# Altium PCB anchor_sdl.PcbDoc
Units mil, origin at the board's own origin, x right, y up, seen from the top; angles counter-clockwise.
Board outline 3149.61 x 3149.61 mil, 4 copper layers (Top Layer, Signal Layer 1, Signal Layer 2, Bottom Layer), stack 58 mil thick; 53 components, 46 nets, 210 pads, 362 vias.
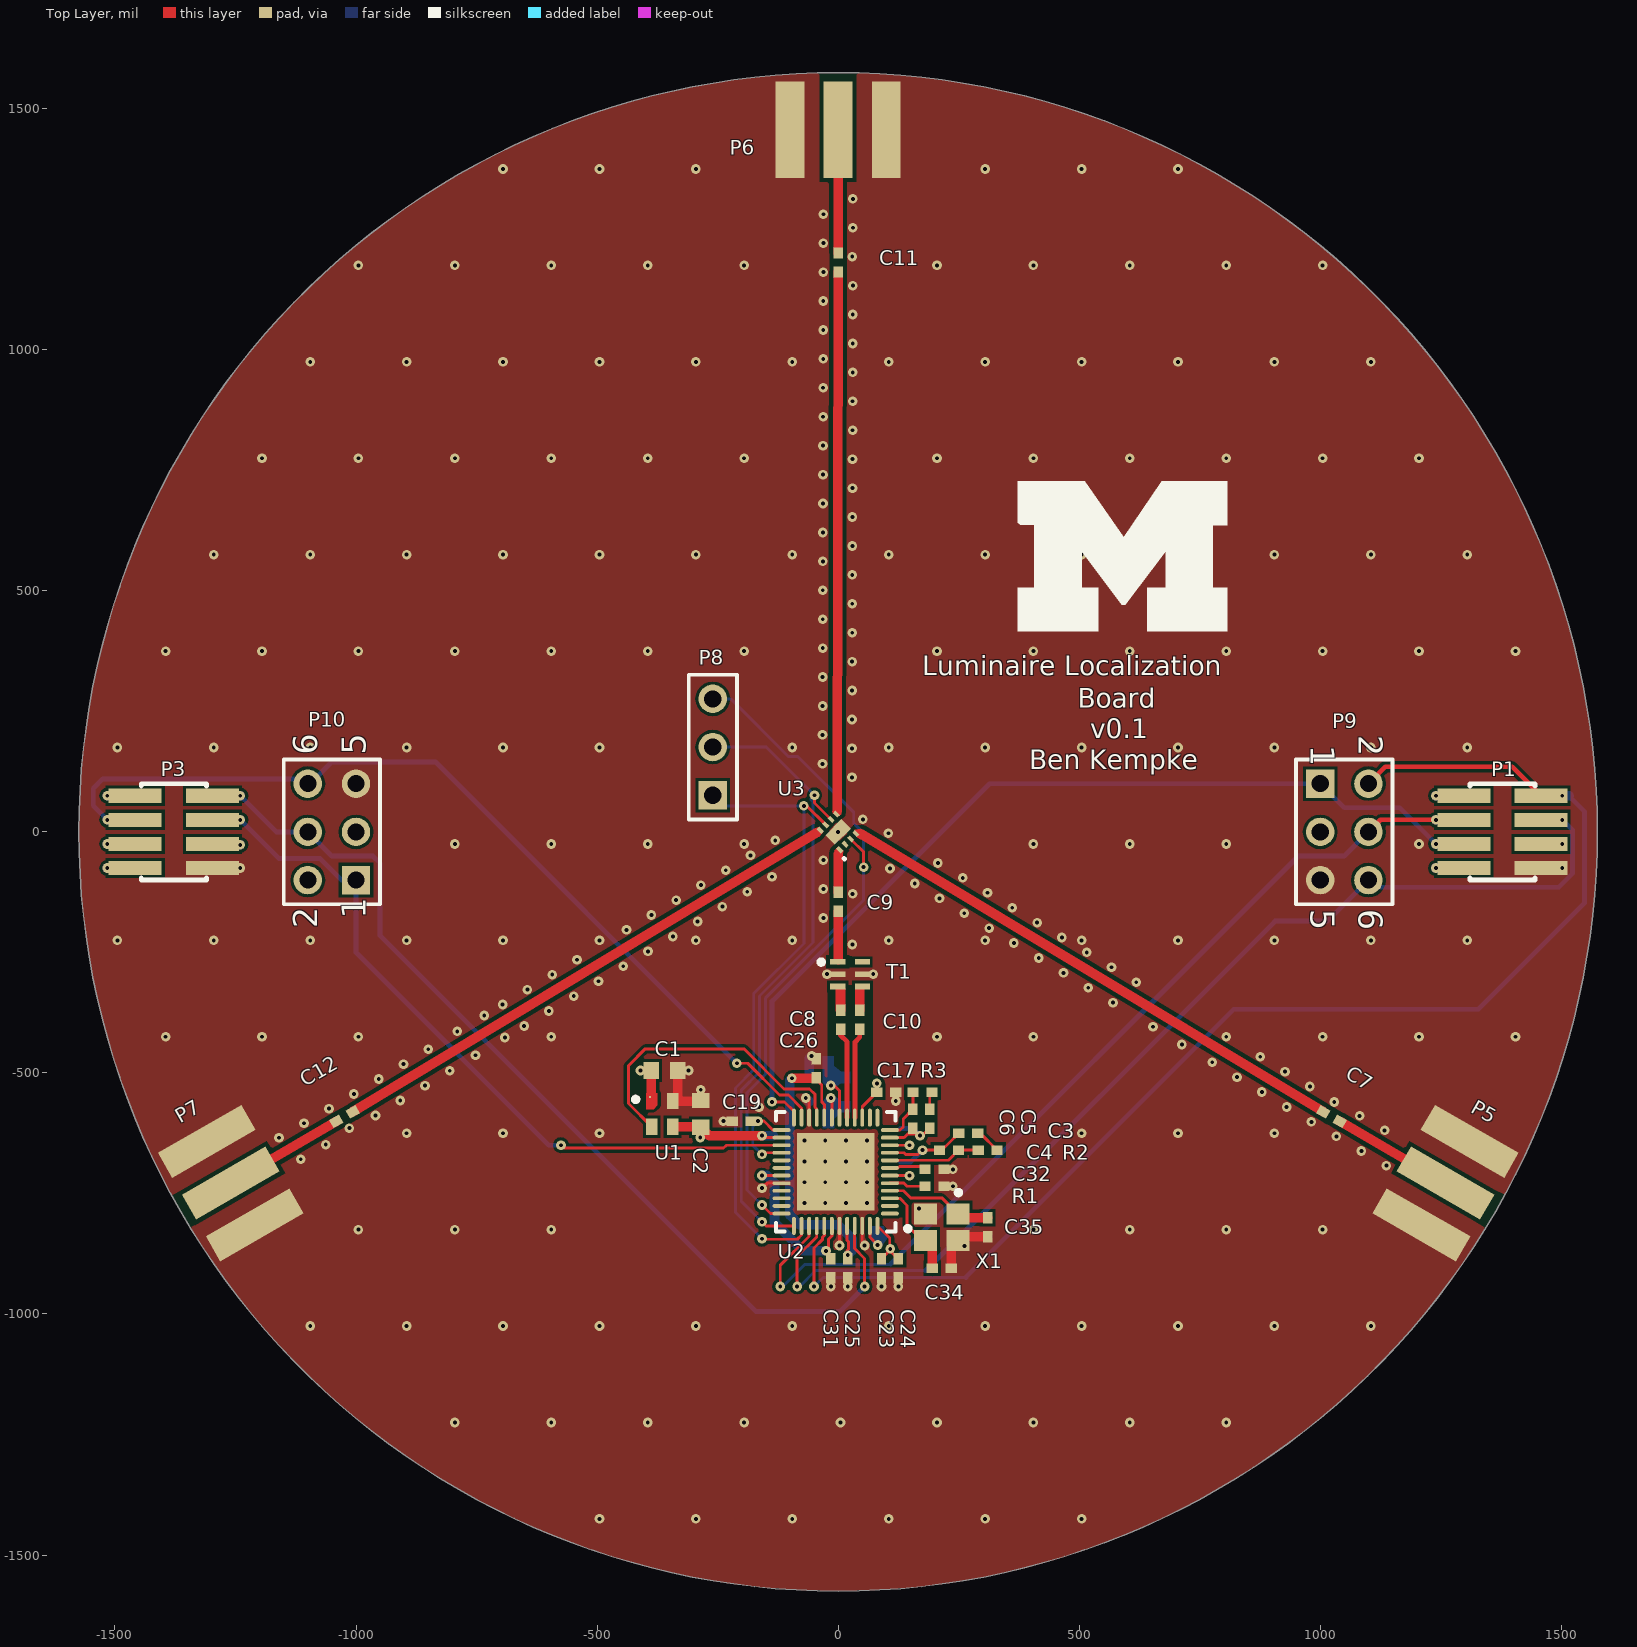
[diagram p0: Top Layer view]
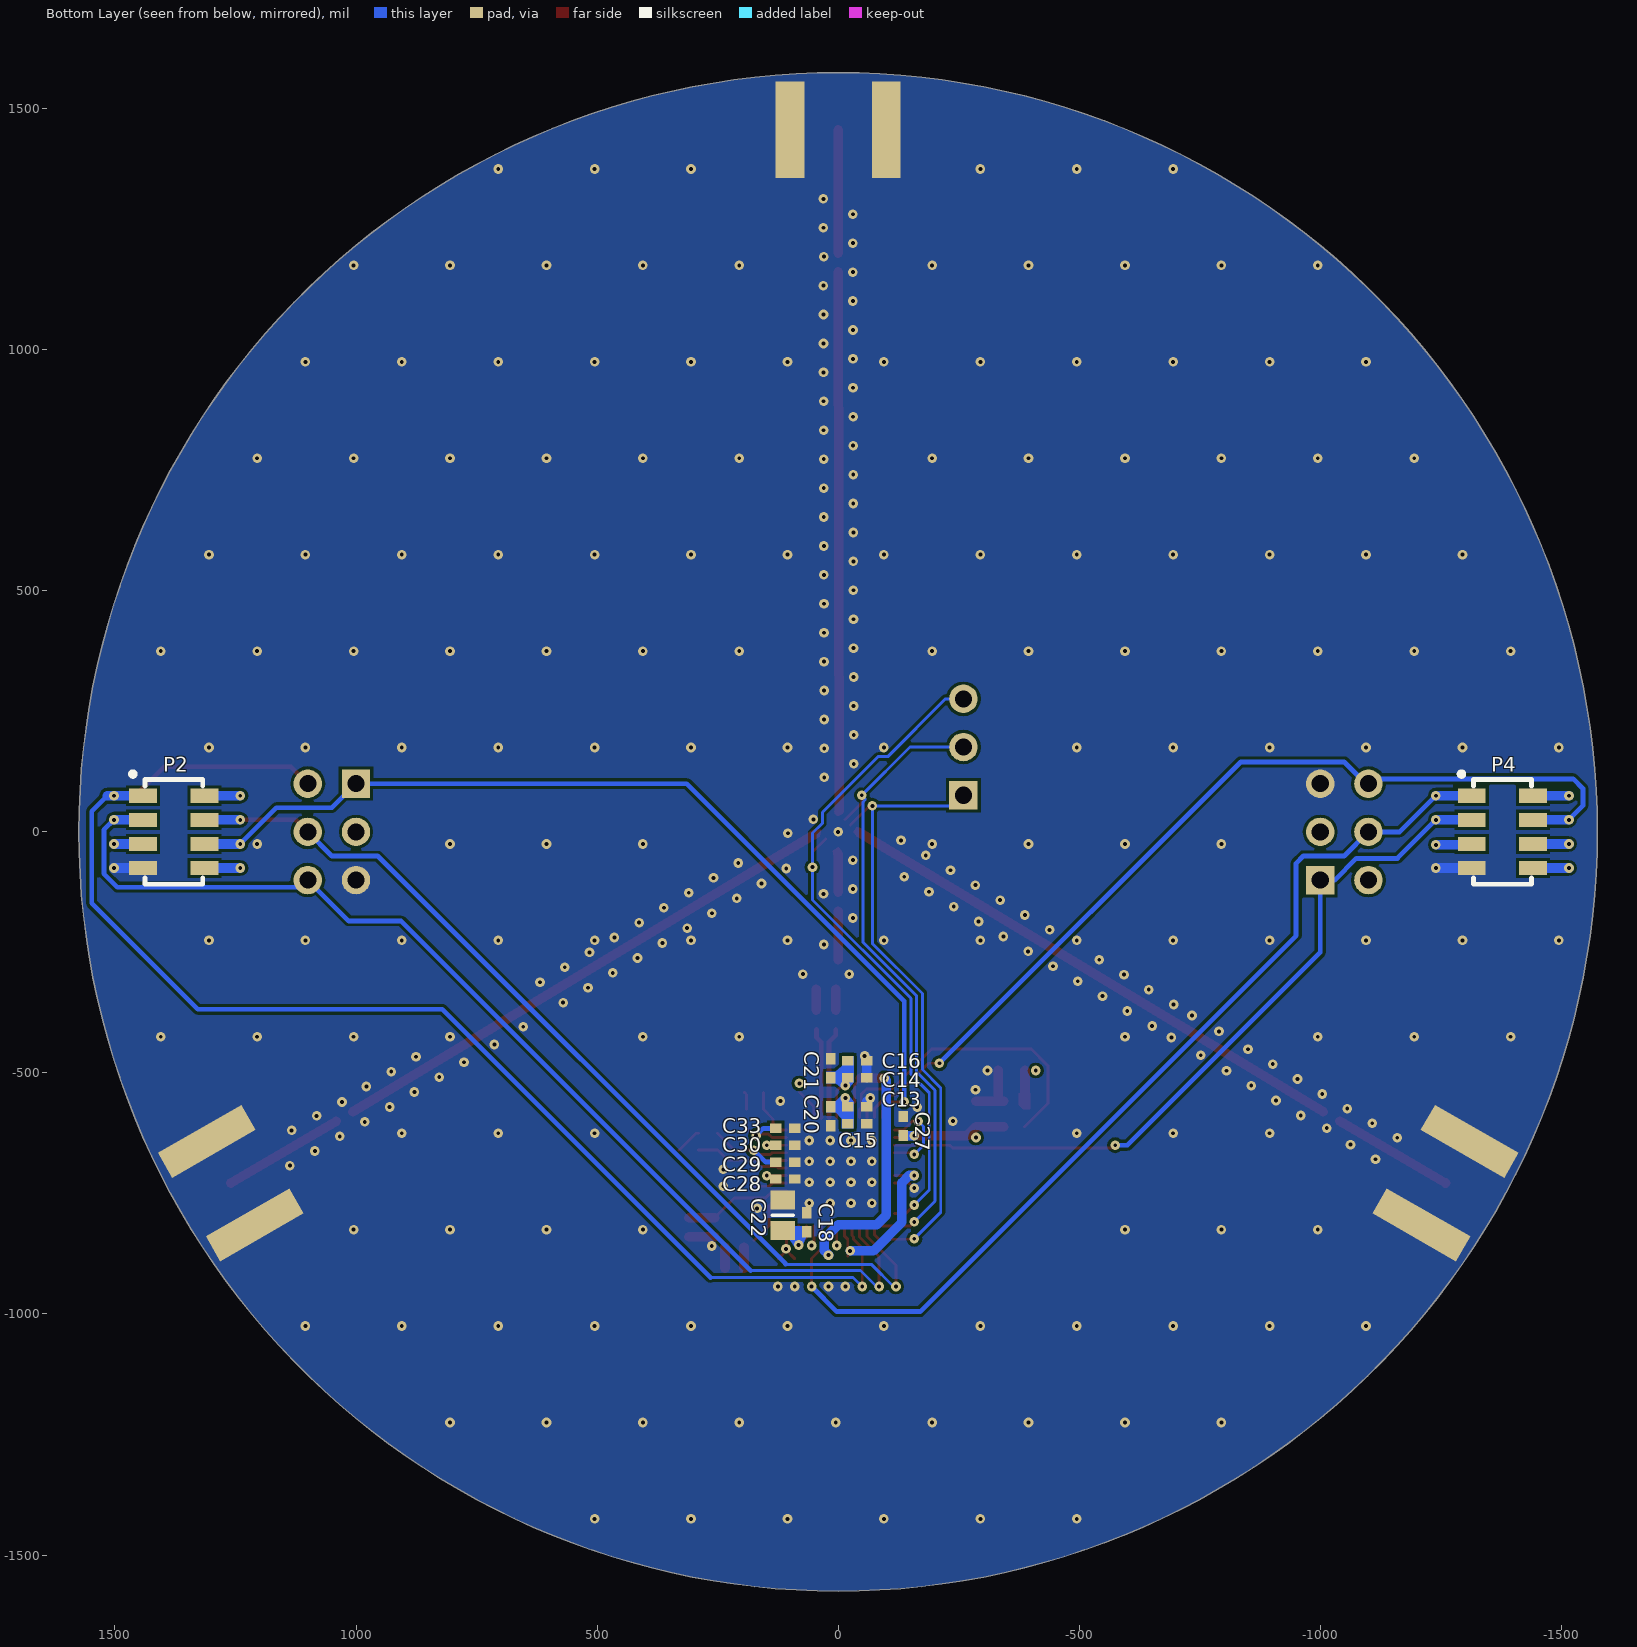
[diagram p1: Bottom Layer view, seen from below]
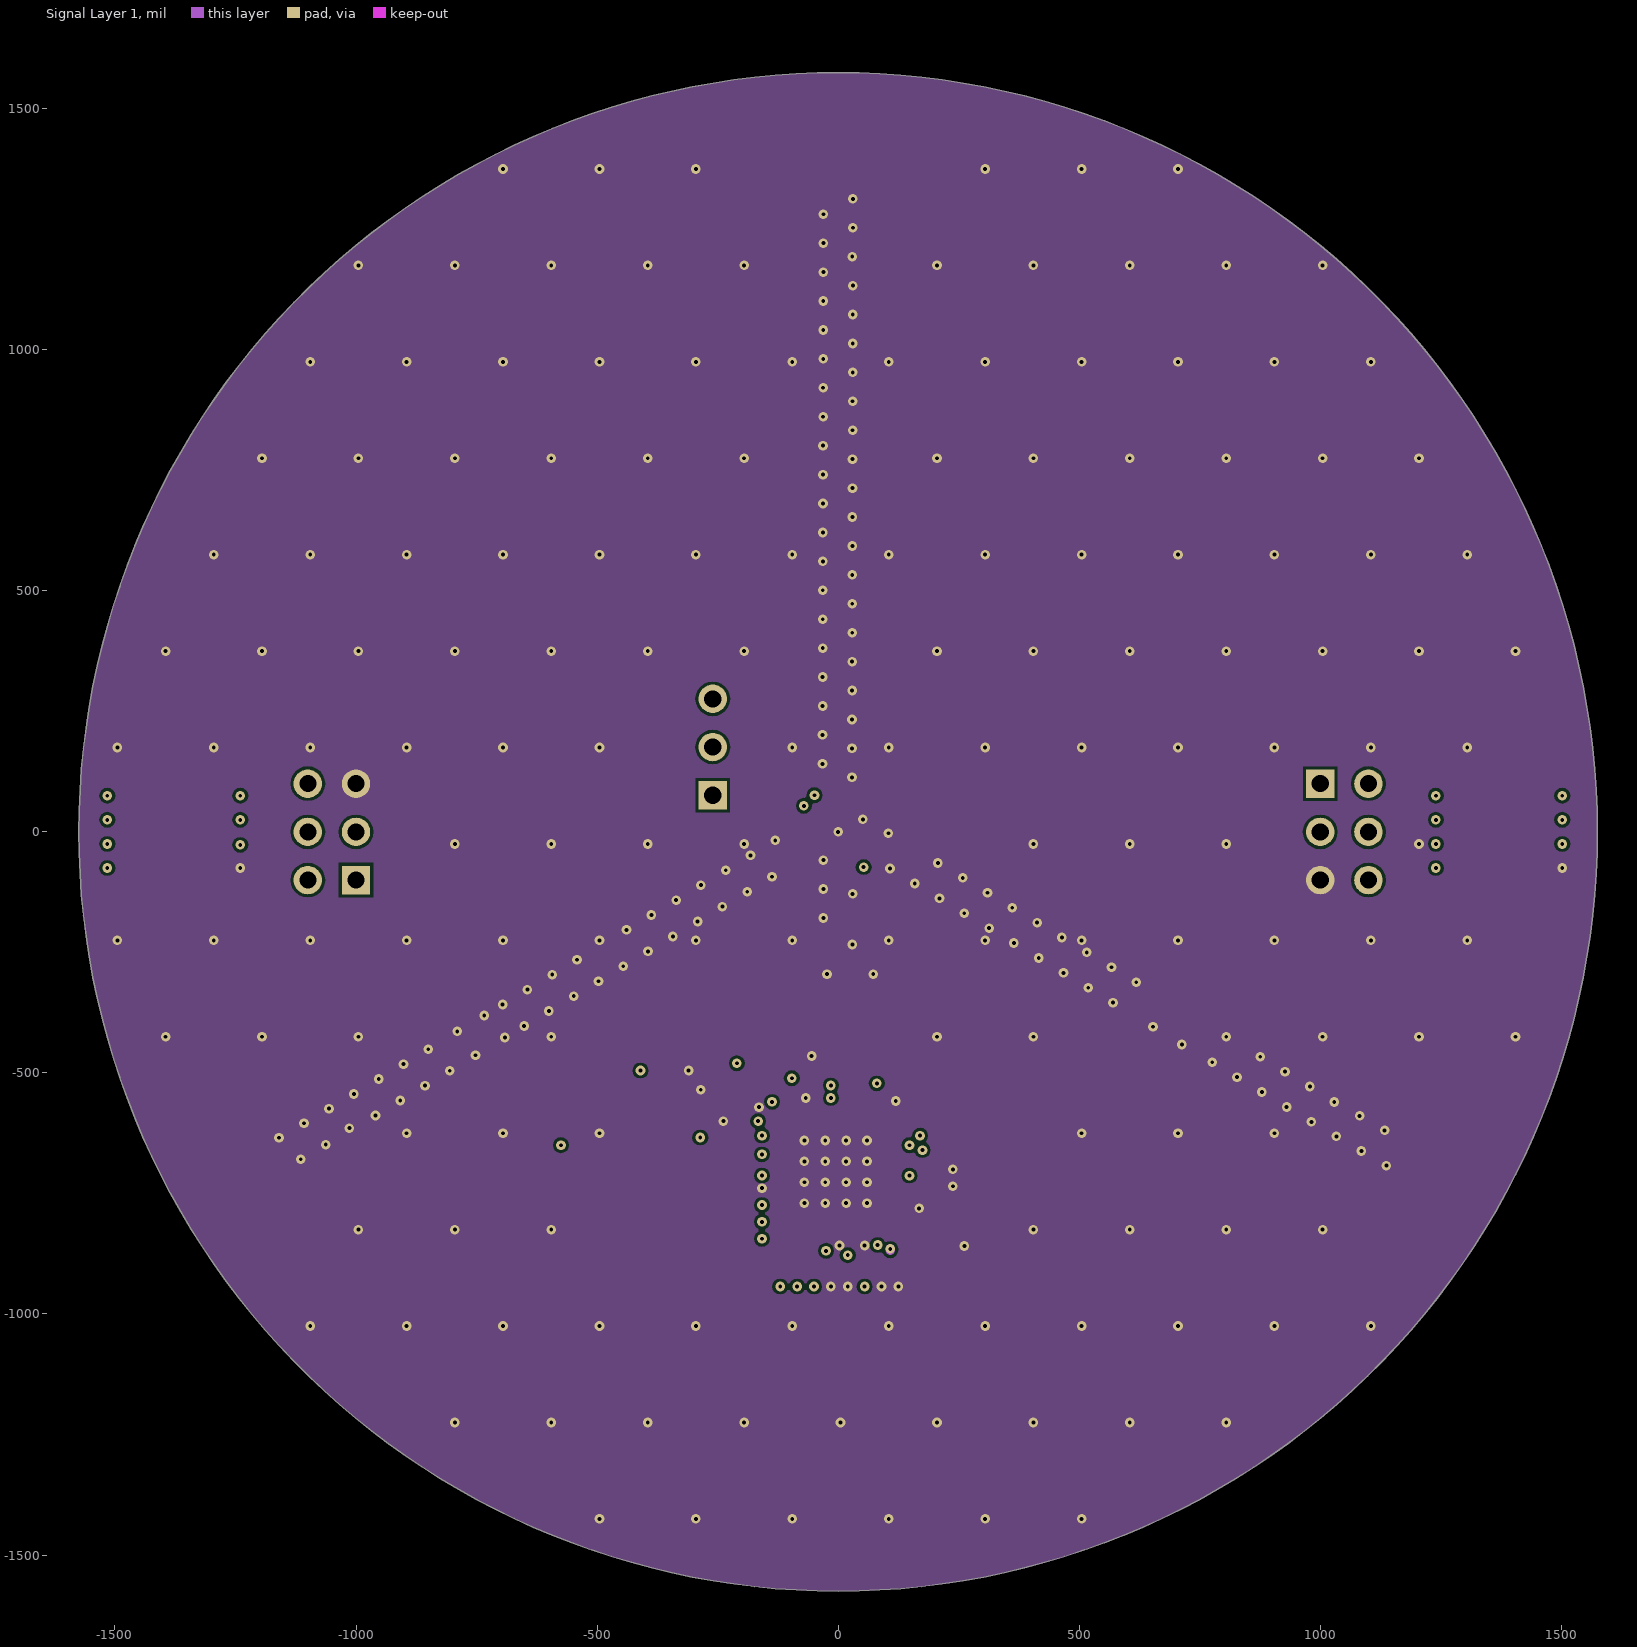
[diagram p2: Signal Layer 1]
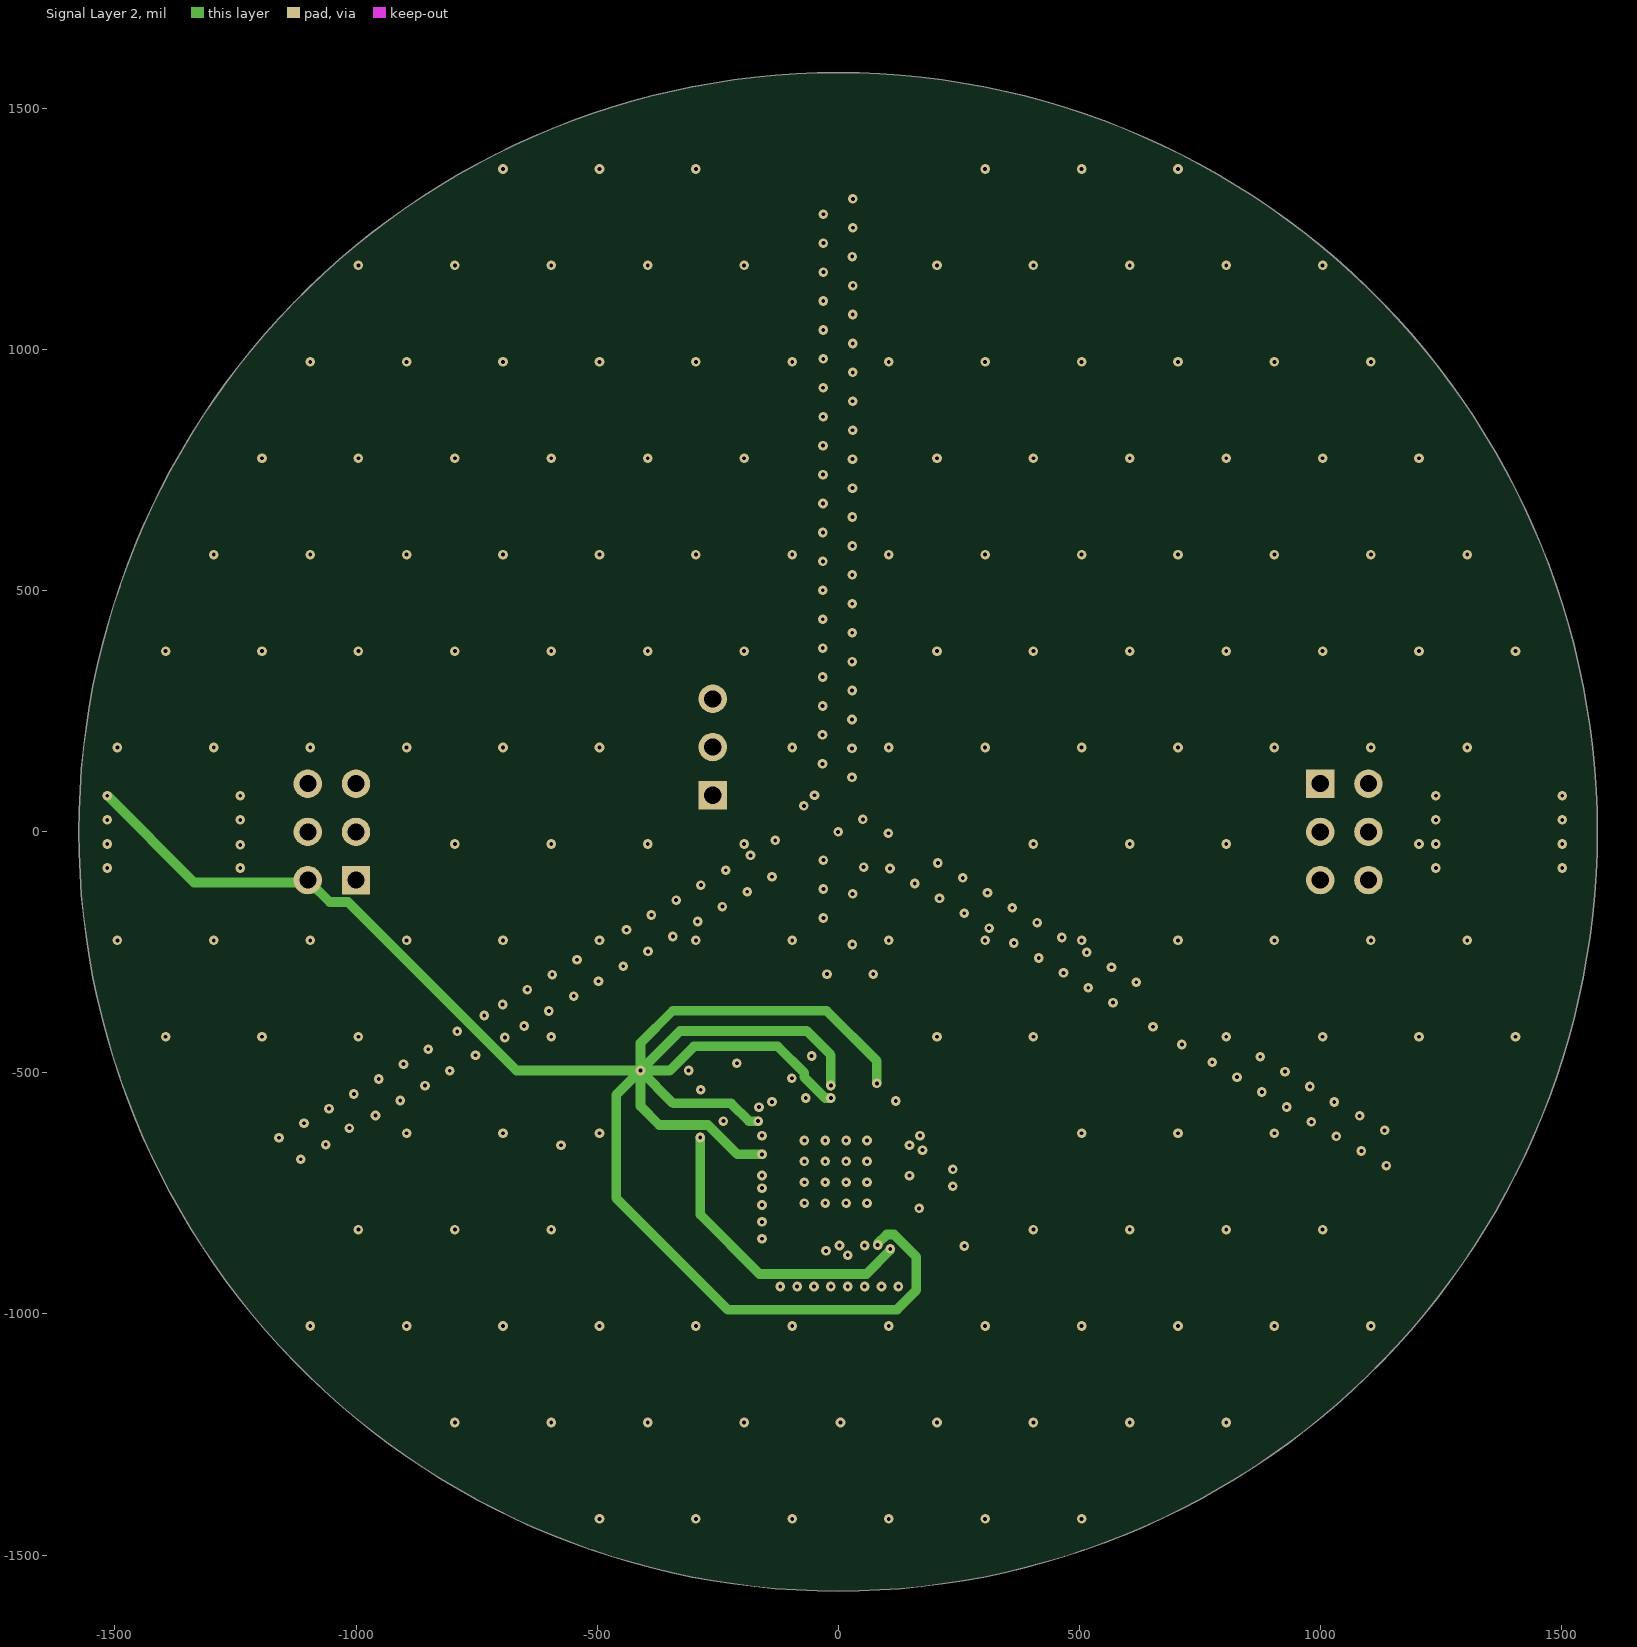
[diagram p3: Signal Layer 2]

## Layer stack, top to bottom
Top Solder: solder mask 0.4, Solder Resist, Dk 3.5
Top Layer: signal copper 1.7
Dielectric 1: core 11.9, FR-4, Dk 4.5
Signal Layer 1: signal copper 1.4
Dielectric 3: prepreg 28, Dk 4.5
Signal Layer 2: signal copper 1.4
Dielectric 2: core 11.9, Dk 4.5
Bottom Layer: signal copper 1.7
Bottom Solder: solder mask 0.4, Solder Resist, Dk 3.5

## Board outline
-1574.8,0 ccw(c0,0) 0,-1574.8 ccw(c0,0) 1574.8,0 ccw(c0,0) 0,1574.8 ccw(c0,0)

## Design rules (kind name [scope] priority, off if disabled: settings)
Clearance [All] p1: gap=6
DiffPairsRouting DiffPair_DiffPairsRouting [InDifferentialPair ('RF')] p1: maxlimit=6 minlimit=6 mostfreqgap=6 toplayer_minwidth=10 toplayer_maxwidth=10 toplayer_prefwidth=10 midlayer1_minwidth=10 midlayer1_maxwidth=10 midlayer1_prefwidth=10 midlayer2_minwidth=10 midlayer2_maxwidth=10 midlayer2_prefwidth=10 bottomlayer_minwidth=10 bottomlayer_maxwidth=10 bottomlayer_prefwidth=10 maxuncoupledlength=500
DiffPairsRouting [All] p2: maxlimit=10 minlimit=10 mostfreqgap=10 toplayer_minwidth=15 toplayer_maxwidth=15 toplayer_prefwidth=15 midlayer1_minwidth=15 midlayer1_maxwidth=15 midlayer1_prefwidth=15 midlayer2_minwidth=15 midlayer2_maxwidth=15 midlayer2_prefwidth=15 bottomlayer_minwidth=15 bottomlayer_maxwidth=15 bottomlayer_prefwidth=15 maxuncoupledlength=500
MatchedLengths DiffPair_MatchedLengths [InDifferentialPair ('RF')] p1: tolerance=1000 checknetsindiffpair=TRUE checkdiffpairvsdiffpair=TRUE checkothers=TRUE
MinimumSolderMaskSliver [All] p1: minsoldermaskwidth=0
PlaneConnect [All] p1: planeconnectstyle=Direct reliefexpansion=20 reliefentries=4 reliefconductorwidth=10 reliefairgap=10
PolygonConnect [All] p1: connectstyle=Direct reliefconductorwidth=10 reliefentries=4 polygonreliefangle="90 Angle" airgapwidth=10
RoutingVias [All] p1: holewidth=8 width=20 viastyle="Through Hole" minholewidth=8 minwidth=20 maxholewidth=238 maxwidth=250
SilkToSilkClearance [All] p1: silktosilkclearance=0
SilkToSolderMaskClearance [IsPad] p1: minsilkscreentomaskgap=0 clearancetoexposedcopper=TRUE
SolderMaskExpansion [All] p1: expansion=4
UnpouredPolygon [All] p1: allowunpoured=FALSE
Width [All] p1: maxlimit=100 minlimit=6 preferedwidth=6
24 further rules are at their usual default settings.

## Classes and differential pairs
component class decawave-rf: C3 C4 C5 C6 C7 C8 C9 C10 C11 C12 C13 C14 C15 C16 C17 C18 C19 C20 C21 C22 C23 C24 C25 C26 C27 C28 C29 C30 C31 C32 C33 C34 C35 P5 P6 P7 P8 R1 R2 R3 T1 U2 U3 X1
component class decawave-power: C1 C2 P1 P2 P3 P4 P9 P10 U1
net class RF: NetC7_1 NetC7_2 NetC9_1 NetC9_2 NetC11_1 NetC11_2 NetC12_1 NetC12_2
differential pair RF: +RF_P -RF_N

## Components (designator, comment, footprint, x,y, rotation, side; value= is the part's Value field where it differs from the comment)
C1 "Cap Chip" 0603 -360,-495 r0 top
C2 "Cap Chip" 0603 -285,-585 r90 top
C3 "Cap Chip" 0402 270,-625 r0 top
C4 "Cap Chip" 0402 230,-660 r0 top
C5 "Cap Chip" 0402 190,-595 r90 top
C6 "Cap Chip" 0402 155,-595 r90 top
C7 "Cap Chip" 0402 1023.62,-590.55 r330 top
C8 "Cap Chip" 0402 5,-390 r90 top
C9 "Cap Chip" 0402 0,-145 r90 top
C10 "Cap Chip" 0402 45,-390 r90 top
C11 "Cap Chip" 0402 0,1181.1 r90 top
C12 "Cap Chip" 0402 -1023.62,-590.55 r210 top
C13 "Cap Chip" 0402 -40,-570 r180 bottom
C14 "Cap Chip" 0402 -40,-510 r180 bottom
C15 "Cap Chip" 0402 -40,-605 r180 bottom
C16 "Cap Chip" 0402 -40,-475 r180 bottom
C17 "Cap Chip" 0402 100,-540 r0 top
C18 "Cap Chip" 0402 65,-810 r90 bottom
C19 "Cap Chip" 0402 -200,-600 r180 top
C20 "Cap Chip" 0402 15,-590 r270 bottom
C21 "Cap Chip" 0402 15,-490 r90 bottom
C22 "Cap Chip" 0805 115,-795 r90 bottom
C23 "Cap Chip" 0402 90,-905 r270 top
C24 "Cap Chip" 0402 125,-905 r270 top
C25 "Cap Chip" 0402 20,-905 r270 top
C26 "Cap Chip" 0402 -45,-490 r90 top
C27 "Cap Chip" 0402 -135,-610 r90 bottom
C28 "Cap Chip" 0402 110,-720 r180 bottom
C29 "Cap Chip" 0402 110,-685 r180 bottom
C30 "Cap Chip" 0402 110,-650 r180 bottom
C31 "Cap Chip" 0402 -15,-905 r270 top
C32 "Cap Chip" 0402 200,-700 r0 top
C33 "Cap Chip" 0402 110,-615 r180 bottom
C34 "Cap Chip" 0402 215,-905 r180 top
C35 "Cap Chip" 0402 310,-820 r90 top
P1 "FTSH Header" SAM_FTSH_2_4 1377.95,0 r0 top
P2 "CLP Header" SAM_CLP_2_4 1377.95,0 r180 bottom
P3 "FTSH Header" SAM_FTSH_2_4 -1377.95,0 r0 top
P4 "CLP Header" SAM_CLP_2_4 -1377.95,0 r180 bottom
P5 "SMA" SMA_EDGE 1259.84,-728.35 r330 top
P6 "SMA" SMA_EDGE 0,1456.69 r90 top
P7 "SMA" SMA_EDGE -1259.84,-728.35 r30 top
P8 "Header 3" HDR1X3 -260,76 r90 top
P9 "Header 3X2" HDR2X3 1000,100 r270 top
P10 "Header 3X2" HDR2X3 -1000,-100 r90 top
R1 "Res Chip" 0402 200,-735 r180 top
R2 "Res Chip" 0402 310,-660 r180 top
R3 "Res Chip" 0402 175,-540 r180 top
T1 "HHM1595A1" "HHM 0805" 25,-295 r270 top
U1 "LXDC2HL" LXDC2HL -365,-585 r90 top
U2 "DW1000" 48QFN-EP -5,-705 r180 top
U3 "SKY13317" MLPQ-UT-8 0,0 r135 top
X1 "FA-20H" FA-20H 215,-820 r180 top

## Footprints (in the part's own frame and the unit in brackets; to place one, negate y for a bottom-side part, rotate by r counter-clockwise, add the part's x,y. Pads: shape width x height; smd on the part's side, far side on the other; paste and mask are expansions set on the pad)
48QFN-EP [mm] "QFN, 48-Leads, Body 6.00x6.00mm, Pitch 0.40mm, Thermal Pad 4.10x4.10mm, IPC Medium Density"
  oval 0.95x0.2 smd: 1(-2.85,2.2) 2(-2.85,1.8) 3(-2.85,1.4) 4(-2.85,1) 5(-2.85,0.6) 6(-2.85,0.2) 7(-2.85,-0.2) 8(-2.85,-0.6) 9(-2.85,-1) 10(-2.85,-1.4) 11(-2.85,-1.8) 12(-2.85,-2.2) 25(2.85,-2.2) 26(2.85,-1.8) 27(2.85,-1.4) 28(2.85,-1) 29(2.85,-0.6) 30(2.85,-0.2) 31(2.85,0.2) 32(2.85,0.6) 33(2.85,1) 34(2.85,1.4) 35(2.85,1.8) 36(2.85,2.2)
  oval 0.2x0.95 smd: 13(-2.2,-2.85) 14(-1.8,-2.85) 15(-1.4,-2.85) 16(-1,-2.85) 17(-0.6,-2.85) 18(-0.2,-2.85) 19(0.2,-2.85) 20(0.6,-2.85) 21(1,-2.85) 22(1.4,-2.85) 23(1.8,-2.85) 24(2.2,-2.85) 37(2.2,2.85) 38(1.8,2.85) 39(1.4,2.85) 40(1,2.85) 41(0.6,2.85) 42(0.2,2.85) 43(-0.2,2.85) 44(-0.6,2.85) 45(-1,2.85) 46(-1.4,2.85) 47(-1.8,2.85) 48(-2.2,2.85)
  rect 4.1x4.1 smd: 49(0,0)
  silkscreen extent -3.93,-3.15 3.15,3.15, body extent -3,-3 3,3, height 0.9
0402 [mm] "Chip Capacitor, Body 1.0x0.5mm, IPC High Density"
  rect 0.6x0.5 smd: 1(-0.5,0) 2(0.5,0)
  body extent -0.55,-0.3 0.55,0.3, height 0.6
0603 [mm] "Chip Capacitor, Body 1.6x0.8mm, IPC High Density"
  rect 0.8x0.9 smd: 1(-0.7,0) 2(0.7,0)
  body extent -0.87,-0.48 0.87,0.48, height 0.9
0805 [mm] "Chip Resistor, Body 2.0x1.2mm, IPC High Density"
  rect 1x1.3 smd: 1(-0.8,0) 2(0.8,0)
  silkscreen extent 0,-0.55 0,0.55, body extent -1.07,-0.7 1.07,0.7, height 0.7
FA-20H [mm]
  rect 1.2x1.1 smd: 1(-0.85,-0.7) 2(0.85,-0.7) 3(0.85,0.7) 4(-0.85,0.7)
  silkscreen extent -1,-1.95 -0.75,-1.7, body extent -1.25,-1 1.25,1, height 0.55
HDR1X3 [mm] "Connector; Header; 3 Position"
  rect 1.5x1.5 hole 0.9: 1(0,0)
  round 1.5 hole 0.9: 2(2.54,0) 3(5.08,0)
  silkscreen extent -1.27,-1.27 6.35,1.27
HDR2X3 [mm] "Connector; Header; 3x2 Position"
  rect 1.5x1.5 hole 0.9: 1(0,0)
  round 1.5 hole 0.9: 2(0,2.54) 3(2.54,0) 4(2.54,2.54) 5(5.08,0) 6(5.08,2.54)
  silkscreen extent -1.27,-1.27 6.35,3.81
"HHM 0805" [mm]
  rect 0.3x0.8 smd: 1(-0.65,-0.65) 2(0,-0.65) 3(0.65,-0.65) 4(0.65,0.65) 5(0,0.65) 6(-0.65,0.65)
  silkscreen extent -0.76,-1.65 -0.51,-1.4
LXDC2HL [mm]
  rect 0.1x0.1 smd: 1(0.889,0.635)
  rect 0.85x0.6 smd: 2(-0.675,0.55) 3(-0.675,-0.55) 4(0.675,-0.55)
  Top Layer region: 0.25,0.85 0.25,0.45 0.45,0.25 1.1,0.25 1.1,0.85
  silkscreen extent 0.64,1.27 0.89,1.52
MLPQ-UT-8 [mm]
  rect 0.35x0.2 smd: 1(-0.725,0.6) 2(-0.725,0.2) 3(-0.725,-0.2) 4(-0.725,-0.6) 5(0.725,-0.6) 6(0.725,-0.2) 7(0.725,0.2) 8(0.725,0.6)
  rect 0.7x1.2 smd: 9(0,0)
  silkscreen extent -1.25,0.77 -1.21,0.77, body extent -0.75,-0.75 0.75,0.75, height 0.4
SAM_CLP_2_4 [mm]
  rect 1.47x0.74 smd: 1(-1.615,1.905) 2(1.615,1.905) 3(-1.615,0.635) 4(1.615,0.635) 5(-1.615,-0.635) 6(1.615,-0.635) 7(-1.615,-1.905) 8(1.615,-1.905)
  silkscreen extent -2.28,-2.76 1.53,3.17, body extent -1.53,-2.76 1.53,2.76, height 2.29
SAM_FTSH_2_4 [mm]
  rect 2.79x0.74 smd: 1(-2.035,1.905) 2(2.035,1.905) 3(-2.035,0.635) 4(2.035,0.635) 5(-2.035,-0.635) 6(2.035,-0.635) 7(-2.035,-1.905) 8(2.035,-1.905)
  silkscreen extent -1.72,-2.54 1.72,2.54, body extent -1.72,-2.54 1.72,2.54, height 2.92
SMA_EDGE [mm]
  rect 5.08x1.52 smd: 1(0,0) 2(0,-2.54) 2(0,2.54)
  rect 5.08x1.52 smd far side: 2(0,-2.54) 2(0,2.54)

## Part data
C1 C2 C3 C4 C5 C6 C7 C8 C9 C10 C11 C12 C13 C14 C15 C16 C17 C18 C19 C20 C21 C22 C23 C24 C25 C26 C27 C28 C29 C30 C31 C32 C33 C34 C35: "Capacitor (Semiconductor SIM Model)"
P1 P3: "Samtec FTSH 2x4 0.05\" Male Header"
P2 P4: "Samtec CLP 2x4 0.05\" Female Header"
P8: "Header, 3-Pin"
P9 P10: "Header, 3-Pin, Dual row"
R1 R2 R3: "Surface-mount resistor"
T1: "UWB Balun"
U3: "SP3T RF Switch"
X1: "2.5 mm x 2.0 mm SMD Crystal"

## Via types
v1: diameter 20, hole 8, Top Layer to Bottom Layer, tented both sides, 346 vias
v2: diameter 20, hole 8, Top Layer to Bottom Layer, 16 vias

## Nets (pads, with @x,y where several pads share a name; then routed paths per layer and width w, separated by ;. In a path a pad name is that pad's centre, name@x,y a point inside that pad or via, vN(x,y) a via of type N, cw(c..) or ccw(c..) an arc to the next point about the centre after c; other vN are vias at no path point)
ANT_SEL0: P8.3 U2.36 U3.3 | length 1443.9
  Top Layer w6: v1(-158,-774) -140.39,-791.61 U2.36 ; U3.3 53,-41.86 v1(53,-73)
  Bottom Layer w6: P8.3 -222.87,276 -102.87,156 -83,156 32.41,40.59 32.41,18 53,-2.58 v1(53,-73) 53,-141.2 -151,-345.2 -151,-503 -189,-541 -189,-743 v1(-158,-774)
ANT_SEL1: P8.2 U2.37 U3.6 | length 1355.8
  Top Layer w6: v1(-158,-809) -149.8,-817.2 U2.37 ; v1(-49,76) -49,60.14 U3.6
  Bottom Layer w6: P8.2 -149,176 v1(-49,76) -56,69 -56,65.87 -52,61.87 -52,-229.23 -163,-340.23 -163,-498.03 -201,-536.03 -201,-766 v1(-158,-809)
ANT_SEL2: P8.1 U2.38 U3.7 | length 1313.1
  Top Layer w6: v1(-158,-844) -157.09,-844.91 -84.91,-844.91 -75.87,-835.87 U2.38 ; v1(-71,54) -65.14,54 U3.7
  Bottom Layer w6: P8.1@-238,54 v1(-71,54) -71,-231.26 -175,-335.26 -175,-493.06 -213,-531.06 -213,-789 v1(-158,-844)
DW_IRQN: P3.2 P4.1 P10.4 U2.45 | length 2042
  Top Layer w6: U2.45 34.37,-864.24 55,-884.87 v1(55,-943)
  Bottom Layer w10: v1(-1240,75) -1165,0 P10.4 -1050,-50 -965,-50 -950,-65 -950,-215 -170,-995 3,-995 v1(55,-943)
  Bottom Layer w20: P4.1@-1300,75 v1(-1240,75)
DW_RSTN: P3.4 P4.3 P10.1 U2.27 | length 1569.6
  Top Layer w6: v1(-574.88,-649.88) -568.76,-656 -237.74,-656 -231.62,-649.88 U2.27
  Bottom Layer w10: v1(-1240,25) -1160,-55 -1075,-55 -1030,-100 P10.1 -1000,-250 -600.12,-649.88 v1(-574.88,-649.88)
  Bottom Layer w20: P4.3 v1(-1240,25)
DW_WAKEUP: P3.3 P4.4 P10.6 U2.23 | length 1954.6
  Top Layer w6: v1(-210,-480) -187.44,-480 -121.44,-546 -103,-546 -75.87,-573.13 U2.23
  Bottom Layer w10: v1(-1515.91,25) -1545,54.09 -1545,90 -1525,110 P10.6@-1110,110 ; P10.6 -1095,100 -1050,145 -835,145 v1(-210,-480)
  Bottom Layer w20: v1(-1515.91,25) P4.4
GND: C1.2 C2.2 C13.2 C14.2 C15.2 C16.2 C17.2 C18.2 C19.2 C20.2 C21.2 C22.2 C23.2 C24.2 C25.2 C26.2 C27.2 C28.2 C29.2 C30.2 C31.2 C32.2 C33.2 C34.1 C35.1 P1.8 P2.7 P3.8 P4.7 P5.2 P6.2 P7.2 P9.5 P10.5 R1.1 T1.2 T1.5 U1.4 U2.22 U2.32 U2.43 U2.46 U2.49 U3.9 X1.2 X1.4 | length 570.2
  Top Layer w6: v1(-158,-739) -157.37,-739 -147,-728.62 U2.32 ; U2.22 v1@-60.12,-552.12 ; v1@2.87,-857.88 U2.43 ; v1@50.12,-853.12 U2.46
  Top Layer w20: U1.4 C2.2@-285.98,-558.43 ; U1.4@-332.44,-555.98 C1.2 ; C34.1 X1.4@234.69,-861.34 ; X1.4@256.34,-839.68 C35.1
  Bottom Layer w20: P4.7 v1(-1240,-75) ; v1(-67,-552) -59.69,-559.31 ; C14.2 C16.2 -59.69,-469.69 v1(-55,-465) ; P2.7 v1(1502,-75)
  other v1: -495,-1425 -295,-1425 -95,-1425 105,-1425 305,-1425 505,-1425 -795,-1225 -595,-1225 -395,-1225 -195,-1225 5,-1225 205,-1225 405,-1225 605,-1225 805,-1225 -1095,-1025 -895,-1025 -695,-1025 -495,-1025 -295,-1025 -95,-1025 105,-1025 305,-1025 505,-1025 705,-1025 905,-1025 1105,-1025 -15,-943 20,-943 90,-943 125,-943 262,-859 2.76,-858 55,-858 -995,-825 -795,-825 -595,-825 405,-825 605,-825 805,-825 1005,-825 168,-781 238,-735 238,-700 1137.21,-692.17 -1114.69,-679.02 1085.39,-661.92 -1062.87,-648.77 -1159.72,-634.48 1033.58,-631.67 -895,-625 -695,-625 -495,-625 505,-625 705,-625 905,-625 1133.59,-619.22 -1013.69,-614.4 -1107.91,-604.23 981.74,-601.47 -238,-600 1081.78,-588.97 -959.71,-588.2 -1056.09,-573.98 -164,-571 930.31,-570.56 1029.06,-560.33 119.69,-558.31 -908.3,-557.27 -1004.32,-543.65 878.88,-539.65 -285,-535 978.44,-528.11 -856.9,-526.33 -952.91,-512.71 827.46,-508.74 927.01,-497.2 -805.49,-495.39 -310,-495 -901.5,-481.77 776.03,-477.84 875.59,-466.3 -752.2,-463.32 -850.09,-450.83 713.03,-441.09 -691.2,-426.39 -1395,-425 -1195,-425 -995,-425 -595,-425 205,-425 405,-425 805,-425 1005,-425 1205,-425 1405,-425 -790.09,-413.83 653.03,-404.09 -651.26,-402.57 -734.09,-380.83 -599.86,-371.63 -695.87,-358.02 570.32,-354.21 -548.45,-340.69 -644.46,-327.08 518.9,-323.3 618.45,-311.76 -497.04,-309.75 -593.06,-296.14 -23,-295 73,-295 467.47,-292.39 567.03,-280.85 -445.63,-278.81 -541.65,-265.2 416.04,-261.48 515.6,-249.94 -394.22,-247.88 29.59,-233.51 364.61,-230.57 -1495,-225 -1295,-225 -1095,-225 -895,-225 -695,-225 -495,-225 -295,-225 -95,-225 105,-225 305,-225 505,-225 705,-225 905,-225 1105,-225 1305,-225 464.17,-219.04 -342.82,-216.94 -438.83,-203.32 313.19,-199.67 412.74,-188.13 -291.41,-186 -30.59,-178.49 -387.42,-172.38 261.76,-168.76 361.32,-157.22 -240,-155.06 -336.02,-141.44 210.33,-137.85 30.2,-128.58 309.89,-126.31 -188.59,-124.12 -30.59,-118.49 -284.61,-110.5 158.91,-106.94 258.46,-95.4 -137.18,-93.18 -233.2,-79.57 107.48,-76.04 207.04,-64.5 -30.59,-58.49 -181.79,-48.63 -795,-25 -595,-25 -395,-25 -195,-25 405,-25 605,-25 805,-25 1205,-25 -130.38,-17.69 104.18,-2.68 0,0 51.41,25.87 28.71,113.13 -32.41,141.13 28.82,173.13 -1495,175 -1295,175 -1095,175 -895,175 -695,175 -495,175 -95,175 105,175 305,175 505,175 705,175 905,175 1105,175 1305,175 -32.31,201.13 28.93,233.13 -32.2,261.13 29.03,293.13 -32.09,321.13 29.14,353.13 -1395,375 -1195,375 -995,375 -795,375 -595,375 -395,375 -195,375 205,375 405,375 605,375 805,375 1005,375 1205,375 1405,375 -31.98,381.13 29.25,413.13 -31.88,441.13 29.36,473.13 -31.77,501.13 29.46,533.13 -31.66,561.13 -1295,575 -1095,575 -895,575 -695,575 -495,575 -295,575 -95,575 105,575 305,575 505,575 705,575 905,575 1105,575 1305,575 29.57,593.13 -31.55,621.13 29.68,653.13 -31.45,681.13 29.79,713.13 -31.34,741.13 29.89,773.13 -1195,775 -995,775 -795,775 -595,775 -395,775 -195,775 205,775 405,775 605,775 805,775 1005,775 1205,775 -31.23,801.13 30,833.13 -31.13,861.13 30.11,893.13 -31.02,921.13 30.21,953.13 -1095,975 -895,975 -695,975 -495,975 -295,975 -95,975 105,975 305,975 505,975 705,975 905,975 1105,975 -30.91,981.13 30.32,1013.13 -30.8,1041.13 30.43,1073.13 -30.7,1101.13 30.54,1133.13 -30.59,1161.13 -995,1175 -795,1175 -595,1175 -395,1175 -195,1175 205,1175 405,1175 605,1175 805,1175 1005,1175 29.46,1193.12 -30.59,1221.13 30.59,1253.11 -30.59,1281.13 30.59,1313.11 -695,1375 -495,1375 -295,1375 305,1375 505,1375 705,1375
  other v2: -69.96,-769.96 -26.65,-769.96 16.65,-769.96 59.96,-769.96 -69.96,-726.65 -26.65,-726.65 16.65,-726.65 59.96,-726.65 -69.96,-683.35 -26.65,-683.35 16.65,-683.35 59.96,-683.35 -69.96,-640.04 -26.65,-640.04 16.65,-640.04 59.96,-640.04
NET_CTRL: P3.6 P4.5 | length 75.2
  Bottom Layer w20: P4.5 -1312.37,-27 v1(-1240,-27)
NET_INT: P3.5 P4.6 | length 74.4
  Bottom Layer w20: v1(-1515.91,-25) P4.6
NetC3_2: C3.2 R2.1 | length 54.5
  Top Layer w6: C3.2 294.68,-625 R2.1
NetC4_2: C4.2 R2.2 U2.8 | length 192
  Top Layer w6: U2.8 125.62,-681.38 126,-681 228.69,-681 C4.2 R2.2
NetC5_2: C5.2 R3.1 | length 37.3
  Top Layer w6: C5.2 190,-544.69 R3.1
NetC6_2: C6.2 R3.2 U2.12 | length 110.4
  Top Layer w6: U2.12 128.61,-618.39 135,-612 135,-595.31 C6.2 R3.2@155,-540.32
NetC7_1: C7.1 U3.4 | length 1119.5
  Top Layer w20: 47,-4 C7.1
NetC7_2: C7.2 P5.1 | length 253.8
  Top Layer w20: C7.2 P5.1
NetC8_2: C8.2 T1.3 | length 44.1
  Top Layer w20: C8.2 T1.3@5,-326.18
NetC9_1: C9.1 T1.1 | length 100.3
  Top Layer w20: T1.1@0,-265 C9.1
NetC9_2: C9.2 U3.1 | length 80.3
  Top Layer w20: C9.2 0,-45
NetC10_2: C10.2 T1.4 | length 44.1
  Top Layer w20: C10.2 T1.4@45,-326.18
NetC11_1: C11.1 U3.5 | length 1117.4
  Top Layer w20: -2,44 C11.1
NetC11_2: C11.2 P6.1 | length 255.9
  Top Layer w20: C11.2 P6.1
NetC12_1: C12.1 U3.8 | length 1122.3
  Top Layer w20: C12.1 -45,-2
NetC12_2: C12.2 P7.1 | length 253.8
  Top Layer w20: P7.1 C12.2
NetC34_2: C34.2 U2.3 X1.3 | length 171.3
  Top Layer w6: U2.3 128.12,-760.12 143,-775 143,-816 X1.3@174.56,-847.56
  Top Layer w20: C34.2 X1.3@195.31,-861.34
NetC35_2: C35.2 U2.4 X1.1 | length 214.8
  Top Layer w6: U2.4 135.37,-744.37 150,-759 215.02,-759 X1.1
  Top Layer w20: X1.1@256.34,-800.31 C35.2
NetP1_7: P1.7 P2.8 | length 74.4
  Bottom Layer w20: v1(1240,-75) P2.8
NetP3_7: P3.7 P4.8 | length 74.4
  Bottom Layer w20: v1(-1515.91,-75) P4.8
NetR1_2: R1.2 U2.5 | length 75.8
  Top Layer w6: U2.5 136.76,-728.62 143.14,-735 R1.2
RF_N: C8.1 U2.17 | length 188.8
  Top Layer w10: C8.1 5,-422 18.62,-435.62 U2.17
RF_P: C10.1 U2.16 | length 186.6
  Top Layer w10: U2.16@35,-592.17 35,-436 45,-426 C10.1
SPI_CLK: P1.2 P2.1 P9.2 U2.41 | length 2770
  Top Layer w6: v1(-50,-943) -50,-862.94 -32,-844.94 -32,-840 -28.62,-836.62 U2.41
  Top Layer w10: P9.2 1135,135 1398.07,135 P1.2
  Bottom Layer w6: v1(-50,-943) -31,-924 265,-924
  Bottom Layer w10: 265,-924 821,-368 1328,-368 1548,-148 1548,42.91 1515.91,75
  Bottom Layer w20: P2.1 v1(1502,75) 1515.91,75
SPI_CSN_DW: P1.5 P2.6 P9.1 U2.24 | length 1965.8
  Top Layer w6: v1(-137,-560) -111,-560 -91.61,-579.39 U2.24
  Bottom Layer w10: v1(-137,-560) -137,-351 314,100 P9.1 1050,50 1165,50 v1(1240,-25)
  Bottom Layer w20: v1(1240,-25) P2.6
SPI_CSN_NET: P1.6 P2.5 | length 60.5
  Bottom Layer w20: P2.5 v1(1502,-25)
SPI_MISO: P1.4 P2.3 P9.6 U2.40 | length 2287.6
  Top Layer w6: v1(-85,-943) -85,-880.97 -44.37,-840.34 U2.40
  Bottom Layer w6: v1@-79.7,-943 -46.7,-910 181.3,-910
  Bottom Layer w10: v1(-85,-943) v1@-79.7,-943 ; 181.3,-910 906.3,-185 1015,-185 P9.6 ; P9.6@1105,-115 1495,-115 1523,-87 1523,4 v1(1502,25)
  Bottom Layer w20: P2.3 v1(1502,25)
SPI_MOSI: P1.3 P2.4 P9.4 U2.39 | length 1985.9
  Top Layer w6: v1(-120,-943) -120,-899 -60.12,-839.12 U2.39
  Top Layer w10: P9.4 1125,25 v1(1240,25)
  Bottom Layer w6: v1@-114.7,-943 -68.7,-897 108,-897 109,-896
  Bottom Layer w10: v1(-120,-943) v1@-114.7,-943 ; 109,-896 955,-50 1050,-50 P9.4
  Bottom Layer w20: v1(1240,25) P2.4
V1P8: C2.1 C23.1 C24.1 C27.1 U1.3 U2.26 U2.48 | length 996.3
  Top Layer w6: v1(-158,-630) -153.87,-634.13 U2.26 ; U2.48 107,-842.59 v1@107,-868.32 ; C23.1 v1@107,-868.32 ; C24.1@124,-885.32 v1@107,-868.32
  Top Layer w20: U1.3 -285.98,-611.57 C2.1 -267.56,-630 v1(-158,-630)
  Signal Layer 1 w20: v1@108,-867.77 v1(108,-865)
  Signal Layer 2 w20: v1(-285.98,-634.02) -285.98,-794.02 -163,-917 58.77,-917 v1@108,-867.77
  Bottom Layer w20: v1(-158,-630) C27.1
V1P8_EN: U1.2 U2.21 | length 637.3
  Top Layer w6: U1.2 -435,-563.23 -435,-485 -400,-450 -195,-450 -112,-533 -59.13,-533 -48,-544.13 -48,-571 -44.37,-574.63 U2.21
V3P3: C1.1 C13.1 C14.1 C15.1 C16.1 C17.1 C18.1 C19.1 C20.1 C21.1 C22.1 P3.1 P4.2 P10.2 U1.1 U2.15 U2.18 U2.19 U2.25 U2.28 U2.47 | length 5379.2
  Top Layer w6: v1(-166,-600) -154,-600 -135.61,-618.39 U2.25 ; v1@-154.63,-665.63 U2.28 ; U2.19 v1@-12.87,-552.87 ; v1@-8,-526 2.87,-536.87 U2.18 ; U2.15 50.12,-570.2 C17.1 ; U2.47 65.87,-840.87 v1(82,-857)
  Top Layer w20: -387.56,-562.44 C1.1
  Signal Layer 2 w20: v1(-1515.91,75) -1335.91,-105 -1095,-105 -1054.47,-145.53 -1016.47,-145.53 -667,-495 v1(-410,-495) ; v1(-166,-600) -185,-600 -222,-563 -342,-563 v1(-410,-495) ; v1(-158,-669) -209,-669 -270,-608 -371,-608 -410,-569 v1(-410,-495) ; v1(-15,-552) -27,-552 -70,-509 -70,-500.23 -125.23,-445 -299,-445 -349,-495 v1(-410,-495) ; v1(-15,-526) -15,-463 -65,-413 -328,-413 v1(-410,-495) ; v1(80.32,-521.68) 80.32,-475.32 -24,-371 -343,-371 -410,-438 v1(-410,-495) ; v1(82,-857) 82,-854.23 101.23,-835 116,-835 162,-881 162,-951 122,-991 -229,-991 -460,-760 -460,-545 v1(-410,-495)
  Bottom Layer w6: v1(-166,-600) -177,-611 -177,-650 v1(-158,-669)
  Bottom Layer w20: v1(-1515.91,75) P4.2
VDDCLK: C3.1 C4.1 C29.1 U2.9 | length 218.4
  Top Layer w6: U2.9 136.76,-665.63 140.13,-669 166,-669 v1(175,-660) 215.31,-660 228.87,-646.44 C3.1
  Bottom Layer w10: C29.1 150,-685 v1(175,-660)
VDDDIG: C25.1 C26.1 U2.20 U2.44 | length 677.5
  Top Layer w6: C26.1@-45.31,-513.68 -34,-525 -34,-559.87 -28.62,-565.25 U2.20 ; C25.1@18.62,-883.94 18.62,-869 21.76,-865.87 21.76,-850.13 18.62,-847 U2.44
  Top Layer w20: v1(-96,-511) C26.1@-46.32,-511
  Bottom Layer w20: v1(-96,-511) -100,-515 -100,-795 -80,-815 0,-815 28.76,-843.76 28.76,-868.77 20,-877.53 v1(20,-878)
VDDIF: C32.1 U2.7 | length 68.4
  Top Layer w6: U2.7 124.52,-697.13 127.65,-693.99 C32.1@174.31,-693.99
VDDIO: C31.1 U2.31 U2.42 | length 352.4
  Top Layer w6: v1@-157.88,-712.87 U2.31 ; C31.1@-20,-880.31 -20,-845 -12.87,-837.87 U2.42
  Bottom Layer w20: v1(-158,-712.76) -147.47,-712.76 -132,-728.23 -132,-810 -73,-869 v1(-25,-869)
VDDMS: C28.1 U2.6 | length 40.7
  Top Layer w6: U2.6 v1@147.88,-712.87
  other v1: 148,-712.99
VDDSYN: C30.1 U2.10 | length 40.7
  Top Layer w6: U2.10 v1@147.88,-649.88
  other v1: 148,-650
VDDVCO: C5.1 C6.1 C33.1 U2.11 | length 139.3
  Top Layer w6: U2.11 137,-634.13 144.13,-627 165,-627 v1@169,-631 ; v1(170,-630) 174.68,-630 C5.1
  Bottom Layer w10: C33.1 155,-615 v1(170,-630)
VSYS: P1.1 P2.2 | length 74.4
  Bottom Layer w20: v1(1240,75) P2.2
pads on no net: P9.3 P10.3 T1.6 U2.1 U2.2 U2.13 U2.14 U2.29 U2.30 U2.33 U2.34 U2.35 U3.2

## Polygon pours and split planes (outlines as drawn)
GND on Top Layer "Bottom Layer-No Net" (solid, pour order 6): -1574.8,0 ccw(c0,0) 0,-1574.8 ccw(c0,0) 1574.8,0 ccw(c0,0) 0,1574.8 ccw(c0,0)
GND on Signal Layer 1 "Bottom Layer-No Net" (solid, pour order 8): -1574.8,0 ccw(c0,0) 0,-1574.8 ccw(c0,0) 1574.8,0 ccw(c0,0) 0,1574.8 ccw(c0,0)
GND on Bottom Layer "Bottom Layer-No Net" (solid, pour order 7): -1574.8,0 ccw(c0,0) 0,-1574.8 ccw(c0,0) 1574.8,0 ccw(c0,0) 0,1574.8 ccw(c0,0)
no net on Top Overlay "Mid-Layer 1-No Net" (solid): 372.69,416.18 372.69,506.59 406.74,506.59 406.74,636.78 373.09,636.53 373.09,727.53 511.09,727.53 592.09,611.46 671.09,727.53 807.09,727.53 807.09,636.53 777.09,636.53 777.09,506.53 807.09,506.53 807.09,416.53 641.09,416.53 641.09,506.53 679.09,506.53 679.09,582.53 592.09,466.81 505.09,582.53 505.09,506.59 539.13,506.59 539.13,416.18

## Other copper
Top Layer:
  pour cut-out: -22,-318 72,-318 72,-548.31 50.12,-570.2 3.2,-570.2 -22,-545
  region net NetC7_1: 46,-15 38,-10 35,4 47,6
  region net NetC9_2: -8,-39 0,-31 11,-39 10,-47
  region net NetC12_1: -51,6 -39,11 -31,0 -39,-10
  region net NetC11_1: -11,39 -12,43 8,44 7,37 1,32
  pour cut-out: -1373.7,-749.14 -1409,-769 -1373,-836 -1332.51,-815.24 -1361,-752
  pour cut-out: 1310.75,-802.68 1377,-841 1411,-766 1362.34,-742.58
  pour cut-out: -38.92,1558.23 -39,1607 38,1608 38.92,1558.23
Bottom Layer:
  region net V3P3: 73,-856 66,-840 66,-818 95,-818 102,-843 91,-860
  region net V3P3: -23,-531 -32,-519 -32,-465 -9,-465 -9,-485 6,-498 25,-498 25,-521 5,-521 -7,-531
  region net V3P3: -23,-547 -32,-560 -32,-615 -8,-615 -8,-595 5,-582 25,-582 25,-559 5,-559 -7,-547

## Silkscreen, mask and mechanical layers (free items; w line width, h text height)
Top Overlay:
  text "Luminaire Localization" at 175,325 h40
  text "Board" at 496.59,257 h40
  text "v0.1" at 523.25,194 h40
  text "Ben Kempke" at 396.62,130 h40
Top Solder:
  lines w100: -1322.84,-765.12 -1040.67,-600.39 -45,-2 ; -2,44 0,1200.79 0,1525 ; 0,-265 0,-125.31 0,-45 ; 24,-564 24,-271 ; 47,-4 1040.67,-600.39 1320.23,-763.6
Mechanical 5:
  circle w10: c0,0 r1574.8

## Text inside footprints (layer, text, board x,y; h text height)
P9: Top Overlay "1" at 980,180 h50 r270; Top Overlay "2" at 1080,200 h50 r270; Top Overlay "5" at 980,-160 h50 r270; Top Overlay "6" at 1080,-160 h50 r270
P10: Top Overlay "1" at -980,-180 h50 r90; Top Overlay "2" at -1080,-200 h50 r90; Top Overlay "5" at -980,160 h50 r90; Top Overlay "6" at -1080,160 h50 r90